# Altium PCB PCB2_X4.PcbDoc
Units mm, origin at the board's own origin, x right, y up, seen from the top; angles counter-clockwise.
Board outline 81.15 x 34.04 mm, 2 copper layers (Top Layer, Bottom Layer); 20 components, 0 nets, 68 pads, 0 vias.
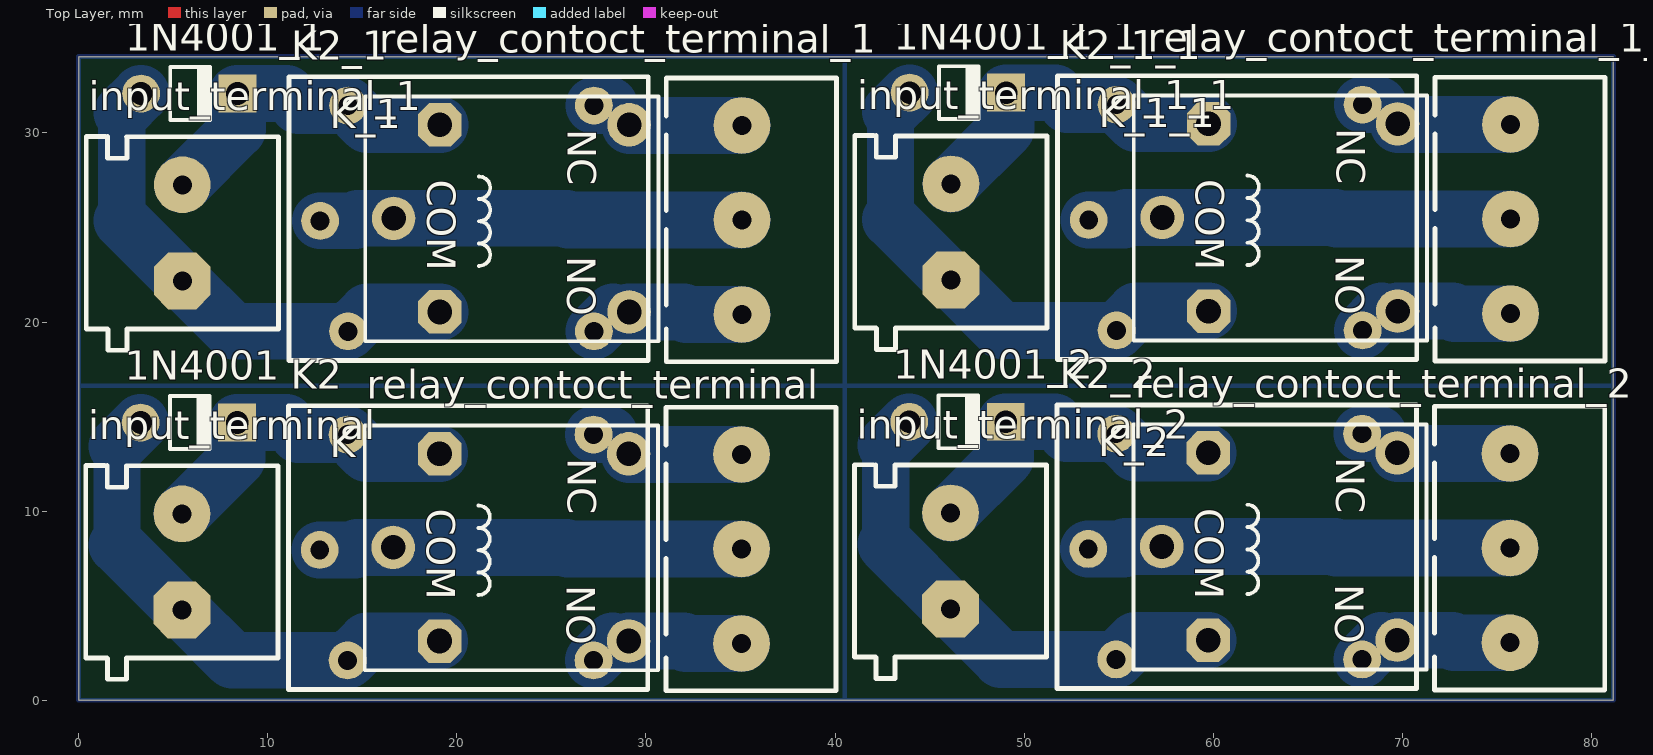
[diagram p0: Top Layer view]
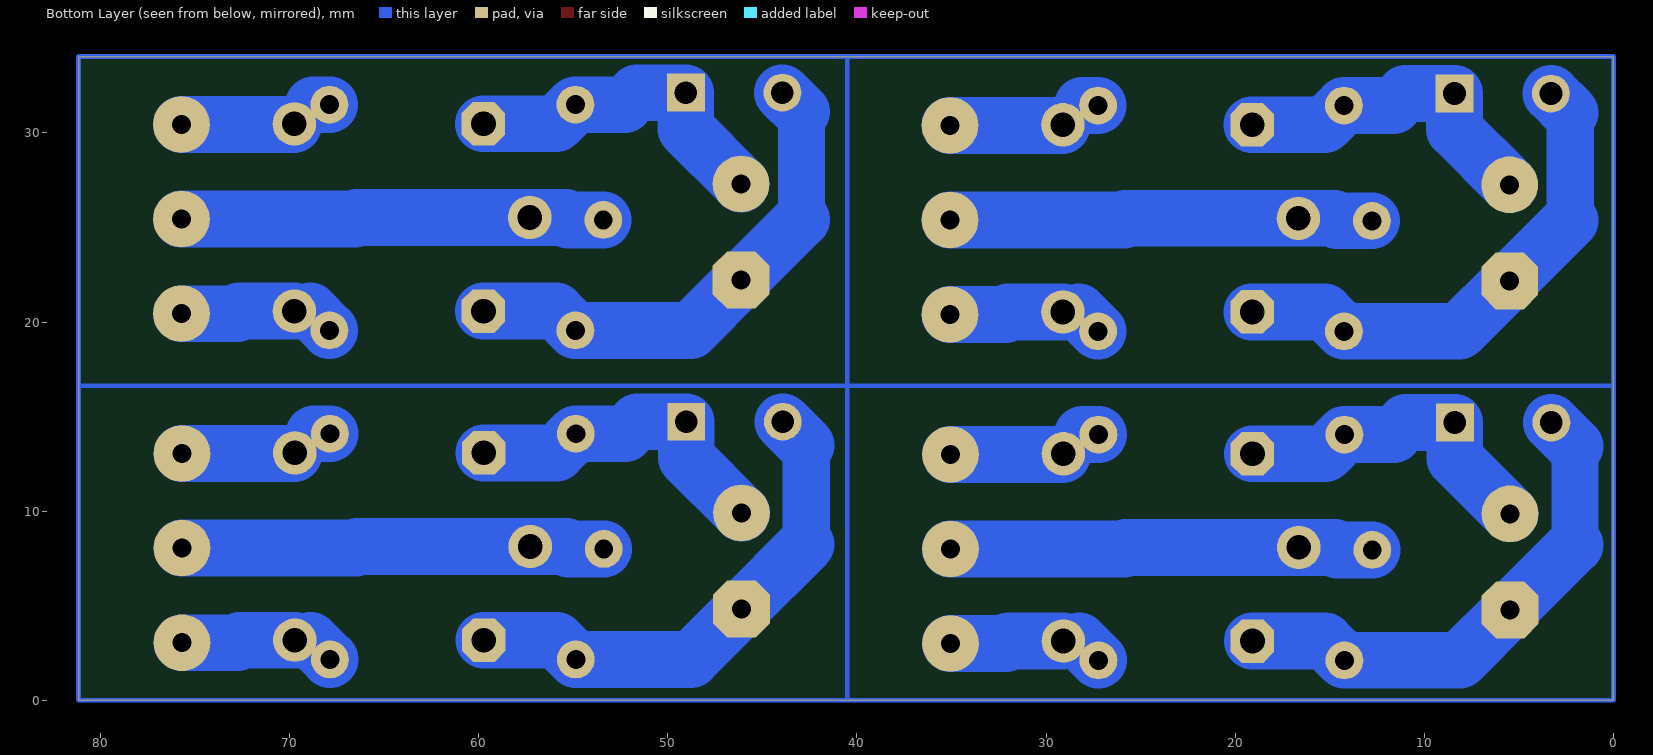
[diagram p1: Bottom Layer view, seen from below]

## Layer stack, top to bottom
Top Solder: solder mask 0.0102, Solder Resist, Dk 3.5
Top Layer: signal copper 0.0356
Dielectric 1: dielectric 0.32, FR-4, Dk 4.8
Bottom Layer: signal copper 0.0356
Bottom Solder: solder mask 0.0102, Solder Resist, Dk 3.5

## Board outline
0,0 0,34.036 81.153,34.036 81.153,0

## Design rules (kind name [scope] priority, off if disabled: settings)
Clearance [All] p1: gap=0.254 ignorepadtopadclearanceinfootprint=FALSE except(0: Arc-Hole Track-Hole SMDPad-Hole THPad-Hole Via-Hole Fill-Hole Poly-Hole Region-Hole Text-Hole)
PolygonConnect [All] p1: connectstyle=Relief reliefconductorwidth=0.254 reliefentries=4 polygonreliefangle="90 Angle" airgapwidth=0.254
RoutingVias [All] p1: holewidth=0.711 width=1.27 viastyle="Through Hole" minholewidth=0.711 minwidth=1.27 maxholewidth=0.711 maxwidth=1.27
SolderMaskExpansion [All] p1: expansion=0.102
Width [All] p1: maxlimit=0.254 minlimit=0.254 preferedwidth=0.254
30 further rules are at their usual default settings.

## Components (designator, comment, footprint, x,y, rotation, side; value= is the part's Value field where it differs from the comment)
1N4001 "Diode 1N4007 vertical" "D 50mm" 8.509,14.685 r0 top
1N4001_1 "Diode 1N4007 vertical" "D 50mm" 8.532,32.084 r0 top (schematic designator 1N4001)
1N4001_1_1 "Diode 1N4007 vertical" "D 50mm" 49.172,32.131 r0 top (schematic designator 1N4001)
1N4001_2 "Diode 1N4007 vertical" "D 50mm" 49.149,14.732 r0 top (schematic designator 1N4001)
input_terminal "CON2 pin blue" My_CN2 0.368,2.252 r90 top
input_terminal_1 "CON2 pin blue" My_CN2 0.391,19.651 r90 top (schematic designator input_terminal)
input_terminal_1_1 "CON2 pin blue" My_CN2 41.031,19.698 r90 top (schematic designator input_terminal)
input_terminal_2 "CON2 pin blue" My_CN2 41.008,2.299 r90 top (schematic designator input_terminal)
K "Relay" "Relay 15.40x12.10x13.10" 16.633,8.084 r270 top
K2 "Relay-05vDC" Relays 11.097,15.574 r270 top
K2_1 "Relay-05vDC" Relays 11.12,32.973 r270 top (schematic designator K2)
K2_1_1 "Relay-05vDC" Relays 51.76,33.02 r270 top (schematic designator K2)
K2_2 "Relay-05vDC" Relays 51.737,15.621 r270 top (schematic designator K2)
K_1 "Relay" "Relay 15.40x12.10x13.10" 16.656,25.483 r270 top (schematic designator K)
K_1_1 "Relay" "Relay 15.40x12.10x13.10" 57.296,25.53 r270 top (schematic designator K)
K_2 "Relay" "Relay 15.40x12.10x13.10" 57.273,8.131 r270 top (schematic designator K)
relay_contoct_terminal "Terminal" "Terminal 1*3" 31.052,15.501 r270 top
relay_contoct_terminal_1 "Terminal" "Terminal 1*3" 31.075,32.9 r270 top (schematic designator relay_contoct_terminal)
relay_contoct_terminal_1_1 "Terminal" "Terminal 1*3" 71.715,32.947 r270 top (schematic designator relay_contoct_terminal)
relay_contoct_terminal_2 "Terminal" "Terminal 1*3" 71.692,15.548 r270 top (schematic designator relay_contoct_terminal)

## Footprints (in the part's own frame and the unit in brackets; to place one, negate y for a bottom-side part, rotate by r counter-clockwise, add the part's x,y. Pads: shape width x height; smd on the part's side, far side on the other; paste and mask are expansions set on the pad)
"D 50mm" [mm] "50mm Pin Spacing"
  round 2 hole 1.2: 1(-5.23,0)
  rect 2x2 hole 1.2: 2(-0.127,0)
  silkscreen extent -3.68,-1.4 -1.49,1.4
My_CN2 [mm]
  oct 3x3 hole 1: 1(2.527,-5.093)
  round 3 hole 1: 2(7.607,-5.093)
  silkscreen extent -1.14,-10.17 10.16,-0.01
"Relay 15.40x12.10x13.10" [mm]
  round 2.3 hole 1.3: 1(0,0) 2(-4.95,12.45) 3(4.95,12.45)
  oct 2.3x2.3 hole 1.3: 4(-4.95,2.45) 5(4.95,2.45)
  silkscreen extent -6.45,-1.5 6.5,14, body extent -6.05,-1.3 6.05,14, height 15.6
Relays [mm]
  round 2 hole 1: 1(7.62,1.651) 2(1.524,16.129) 3(13.462,16.129) 4(1.524,3.127) 5(13.462,3.127)
  silkscreen extent 0,0 15,19
"Terminal 1*3" [mm]
  round 3 hole 1: 1(2.5,4) 2(7.5,4) 3(12.5,4)
  silkscreen extent 0,0 15,9

## Part data
1N4001 1N4001_1 1N4001_1_1 1N4001_2: "1 Amp General Purpose Rectifier", Publisher="seyed mohsen ghasemian"
input_terminal input_terminal_1 input_terminal_1_1 input_terminal_2: "Connector blue screw"
K K_1 K_1_1 K_2: "SPDT Relay", Company=E.P.I.L, Design_Date=2011/10/31, Designer="Eng. Saeid Jorablo"
K2 K2_1 K2_1_1 K2_2: "Relay-05vDC-240AC 5A", ComponentLinkURL=www.picpars.com, Designer="Seyed Mohsen Ghasemain"
relay_contoct_terminal relay_contoct_terminal_1 relay_contoct_terminal_1_1 relay_contoct_terminal_2: library part "Terminal 1*3", "Terminal 3 Pin 250VAC 16A", ComponentLinkURL=www.picpars.com, Designer="Seyed Mohsen Ghasemain", E-mail=picpars@gmail.com

## Nets (pads, with @x,y where several pads share a name; then routed paths per layer and width w, separated by ;. In a path a pad name is that pad's centre, name@x,y a point inside that pad or via, vN(x,y) a via of type N, cw(c..) or ccw(c..) an arc to the next point about the centre after c; other vN are vias at no path point)
pads on no net: 1N4001.1 1N4001.2 1N4001_1.1 1N4001_1.2 1N4001_1_1.1 1N4001_1_1.2 1N4001_2.1 1N4001_2.2 input_terminal.1 input_terminal.2 input_terminal_1.1 input_terminal_1.2 input_terminal_1_1.1 input_terminal_1_1.2 input_terminal_2.1 input_terminal_2.2 K2.1 K2.2 K2.3 K2.4 K2.5 K2_1.1 K2_1.2 K2_1.3 K2_1.4 K2_1.5 K2_1_1.1 K2_1_1.2 K2_1_1.3 K2_1_1.4 K2_1_1.5 K2_2.1 K2_2.2 K2_2.3 K2_2.4 K2_2.5 K.1 K.2 K.3 K.4 K.5 K_1.1 K_1.2 K_1.3 K_1.4 K_1.5 K_1_1.1 K_1_1.2 K_1_1.3 K_1_1.4 K_1_1.5 K_2.1 K_2.2 K_2.3 K_2.4 K_2.5 relay_contoct_terminal.1 relay_contoct_terminal.2 relay_contoct_terminal.3 relay_contoct_terminal_1.1 relay_contoct_terminal_1.2 relay_contoct_terminal_1.3 relay_contoct_terminal_1_1.1 relay_contoct_terminal_1_1.2 relay_contoct_terminal_1_1.3 relay_contoct_terminal_2.1 relay_contoct_terminal_2.2 relay_contoct_terminal_2.3
copper on no net: | length 678.7
  Bottom Layer w0.254: 0,16.637 40.513,16.637 81.153,16.637 ; 40.513,0 40.513,34.036 ; 0,0 0,34.036 81.153,34.036 81.153,0 0,0
  Bottom Layer w0.5: 10.973,14.685 11.608,14.05 ; 10.996,32.084 11.631,31.449 ; 14.605,7.954 14.735,8.084 ; 14.628,25.353 14.758,25.483 ; 25.781,8.084 25.864,8.001 ; 25.804,25.483 25.887,25.4 ; 28.067,14.05 29.083,13.034 ; 28.09,31.449 29.106,30.433 ; 28.248,3.134 29.083,3.134 ; 28.271,20.533 29.106,20.533 ; 31.979,3.134 32.112,3.001 ; 32.002,20.533 32.135,20.4 ; 51.613,14.732 52.248,14.097 ; 51.636,32.131 52.271,31.496 ; 55.245,8.001 55.375,8.131 ; 55.268,25.4 55.398,25.53 ; 66.421,8.131 66.504,8.048 ; 66.444,25.53 66.527,25.447 ; 68.707,14.097 69.723,13.081 ; 68.73,31.496 69.746,30.48 ; 68.888,3.181 69.723,3.181 ; 68.911,20.58 69.746,20.58 ; 72.619,3.181 72.752,3.048 ; 72.642,20.58 72.775,20.447
  Bottom Layer w1: 29.083,13.034 29.116,13.001 ; 29.106,30.433 29.139,30.4 ; 69.723,13.081 69.756,13.048 ; 69.746,30.48 69.779,30.447
  Bottom Layer w2.5: 2.032,8.208 2.032,13.438 ; 2.286,25.376 2.286,31.068 ; 42.672,8.255 42.672,13.485 ; 42.926,25.423 42.926,31.115
  Bottom Layer w3: 2.032,8.208 5.461,4.779 8.128,2.112 14.224,2.112 15.246,3.134 19.083,3.134 ; 2.032,13.438 3.279,14.685 ; 2.286,25.376 5.484,22.178 8.151,19.511 14.247,19.511 15.269,20.533 19.106,20.533 ; 2.286,31.068 3.302,32.084 ; 5.461,9.859 8.382,12.78 8.382,14.685 10.973,14.685 ; 5.484,27.258 8.405,30.179 8.405,32.084 10.996,32.084 ; 11.608,14.05 14.224,14.05 15.24,13.034 19.083,13.034 ; 11.631,31.449 14.247,31.449 15.263,30.433 19.106,30.433 ; 12.748,7.954 14.605,7.954 ; 12.771,25.353 14.628,25.353 ; 14.735,8.084 16.633,8.084 25.781,8.084 ; 14.758,25.483 16.656,25.483 25.804,25.483 ; 25.864,8.001 35.052,8.001 ; 25.887,25.4 35.075,25.4 ; 27.226,2.112 28.248,3.134 ; 27.226,14.05 28.067,14.05 ; 27.249,19.511 28.271,20.533 ; 27.249,31.449 28.09,31.449 ; 29.083,3.134 31.979,3.134 ; 29.106,20.533 32.002,20.533 ; 29.116,13.001 35.052,13.001 ; 29.139,30.4 35.075,30.4 ; 32.112,3.001 35.052,3.001 ; 32.135,20.4 35.075,20.4 ; 42.672,8.255 46.101,4.826 48.768,2.159 54.864,2.159 55.886,3.181 59.723,3.181 ; 42.672,13.485 43.919,14.732 ; 42.926,25.423 46.124,22.225 48.791,19.558 54.887,19.558 55.909,20.58 59.746,20.58 ; 42.926,31.115 43.942,32.131 ; 46.101,9.906 49.022,12.827 49.022,14.732 51.613,14.732 ; 46.124,27.305 49.045,30.226 49.045,32.131 51.636,32.131 ; 52.248,14.097 54.864,14.097 55.88,13.081 59.723,13.081 ; 52.271,31.496 54.887,31.496 55.903,30.48 59.746,30.48 ; 53.388,8.001 55.245,8.001 ; 53.411,25.4 55.268,25.4 ; 55.375,8.131 57.273,8.131 66.421,8.131 ; 55.398,25.53 57.296,25.53 66.444,25.53 ; 66.504,8.048 75.692,8.048 ; 66.527,25.447 75.715,25.447 ; 67.866,2.159 68.888,3.181 ; 67.866,14.097 68.707,14.097 ; 67.889,19.558 68.911,20.58 ; 67.889,31.496 68.73,31.496 ; 69.723,3.181 72.619,3.181 ; 69.746,20.58 72.642,20.58 ; 69.756,13.048 75.692,13.048 ; 69.779,30.447 75.715,30.447 ; 72.752,3.048 75.692,3.048 ; 72.775,20.447 75.715,20.447

## Text inside footprints (layer, text, board x,y; h text height)
K: Top Overlay "NC" at 25.853,12.808 h1.5 r270; Top Overlay "NO" at 25.802,6.077 h1.5 r270; Top Overlay "COM" at 18.411,10.116 h1.5 r270
K_1: Top Overlay "NC" at 25.876,30.207 h1.5 r270; Top Overlay "NO" at 25.825,23.476 h1.5 r270; Top Overlay "COM" at 18.434,27.515 h1.5 r270
K_1_1: Top Overlay "NC" at 66.516,30.254 h1.5 r270; Top Overlay "NO" at 66.465,23.523 h1.5 r270; Top Overlay "COM" at 59.074,27.562 h1.5 r270
K_2: Top Overlay "NC" at 66.493,12.855 h1.5 r270; Top Overlay "NO" at 66.442,6.124 h1.5 r270; Top Overlay "COM" at 59.051,10.163 h1.5 r270